# Altium PCB Arduino mega shield.PcbDoc
Units mil, origin at the board's own origin, x right, y up, seen from the top; angles counter-clockwise.
Board outline 5118.11 x 3346.46 mil, 2 copper layers (Top Layer, Bottom Layer); 32 components, 122 nets, 161 pads, 0 vias.
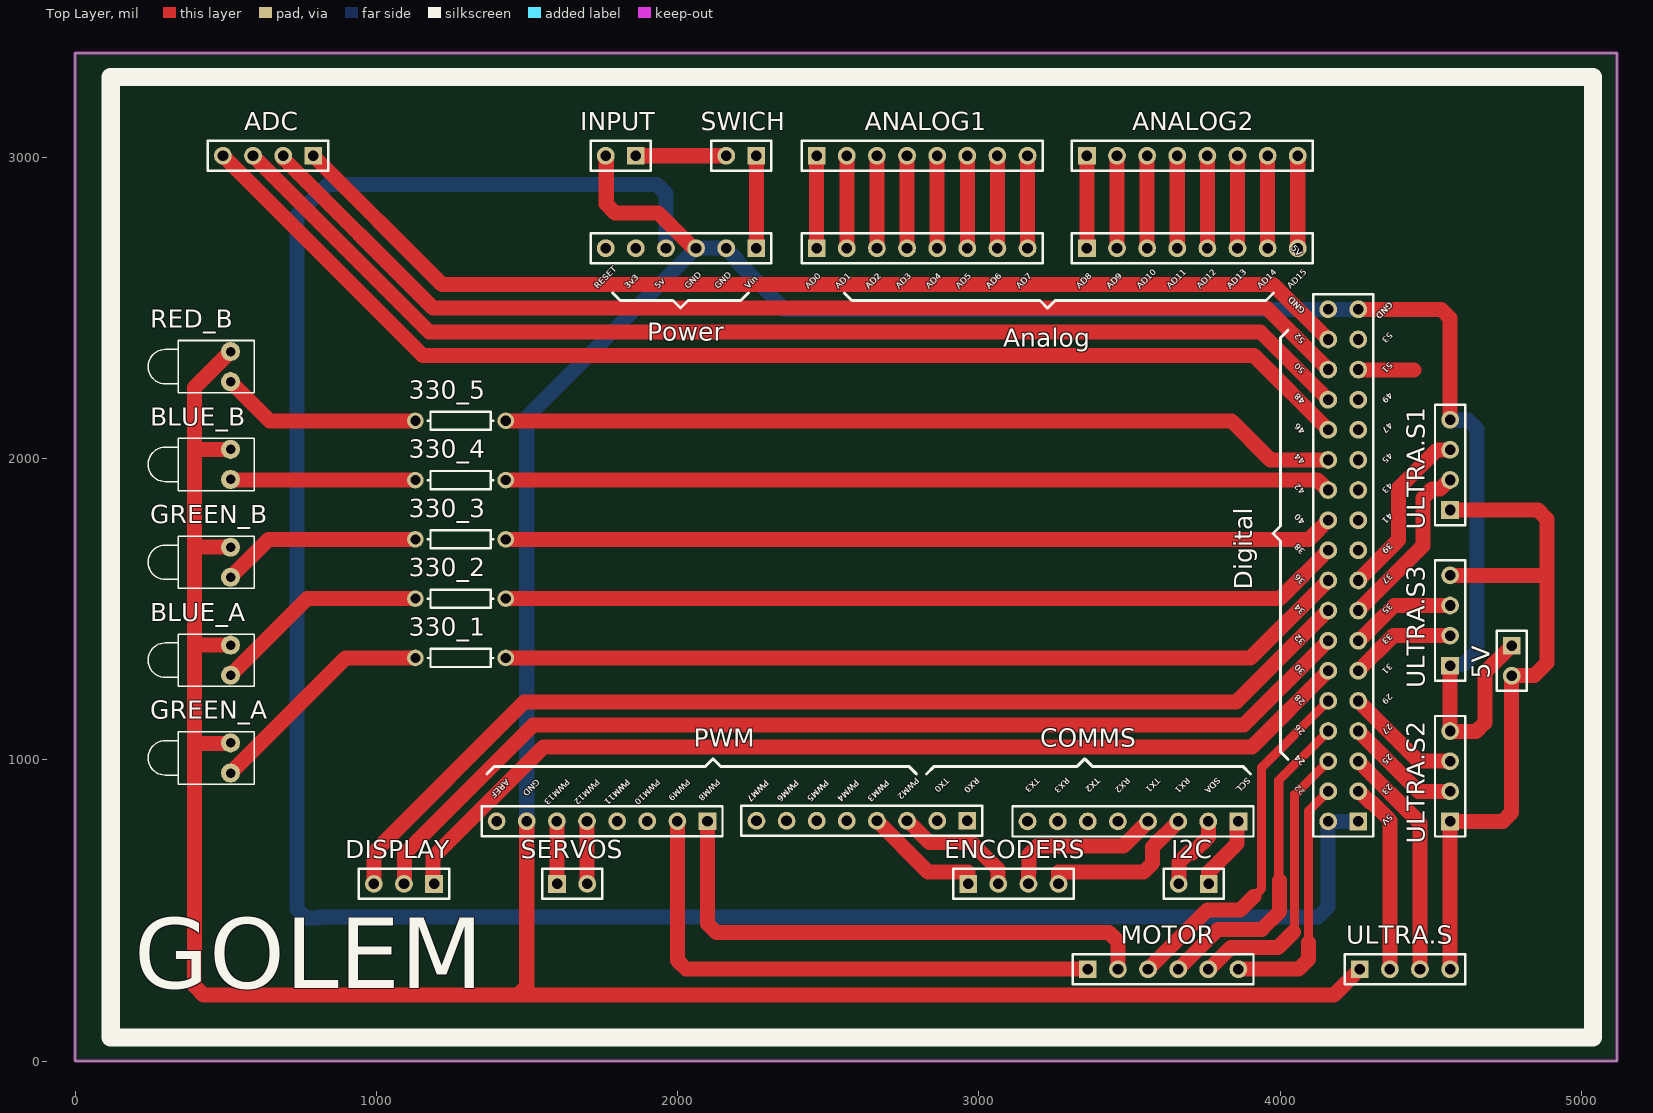
[diagram p0: Top Layer view]
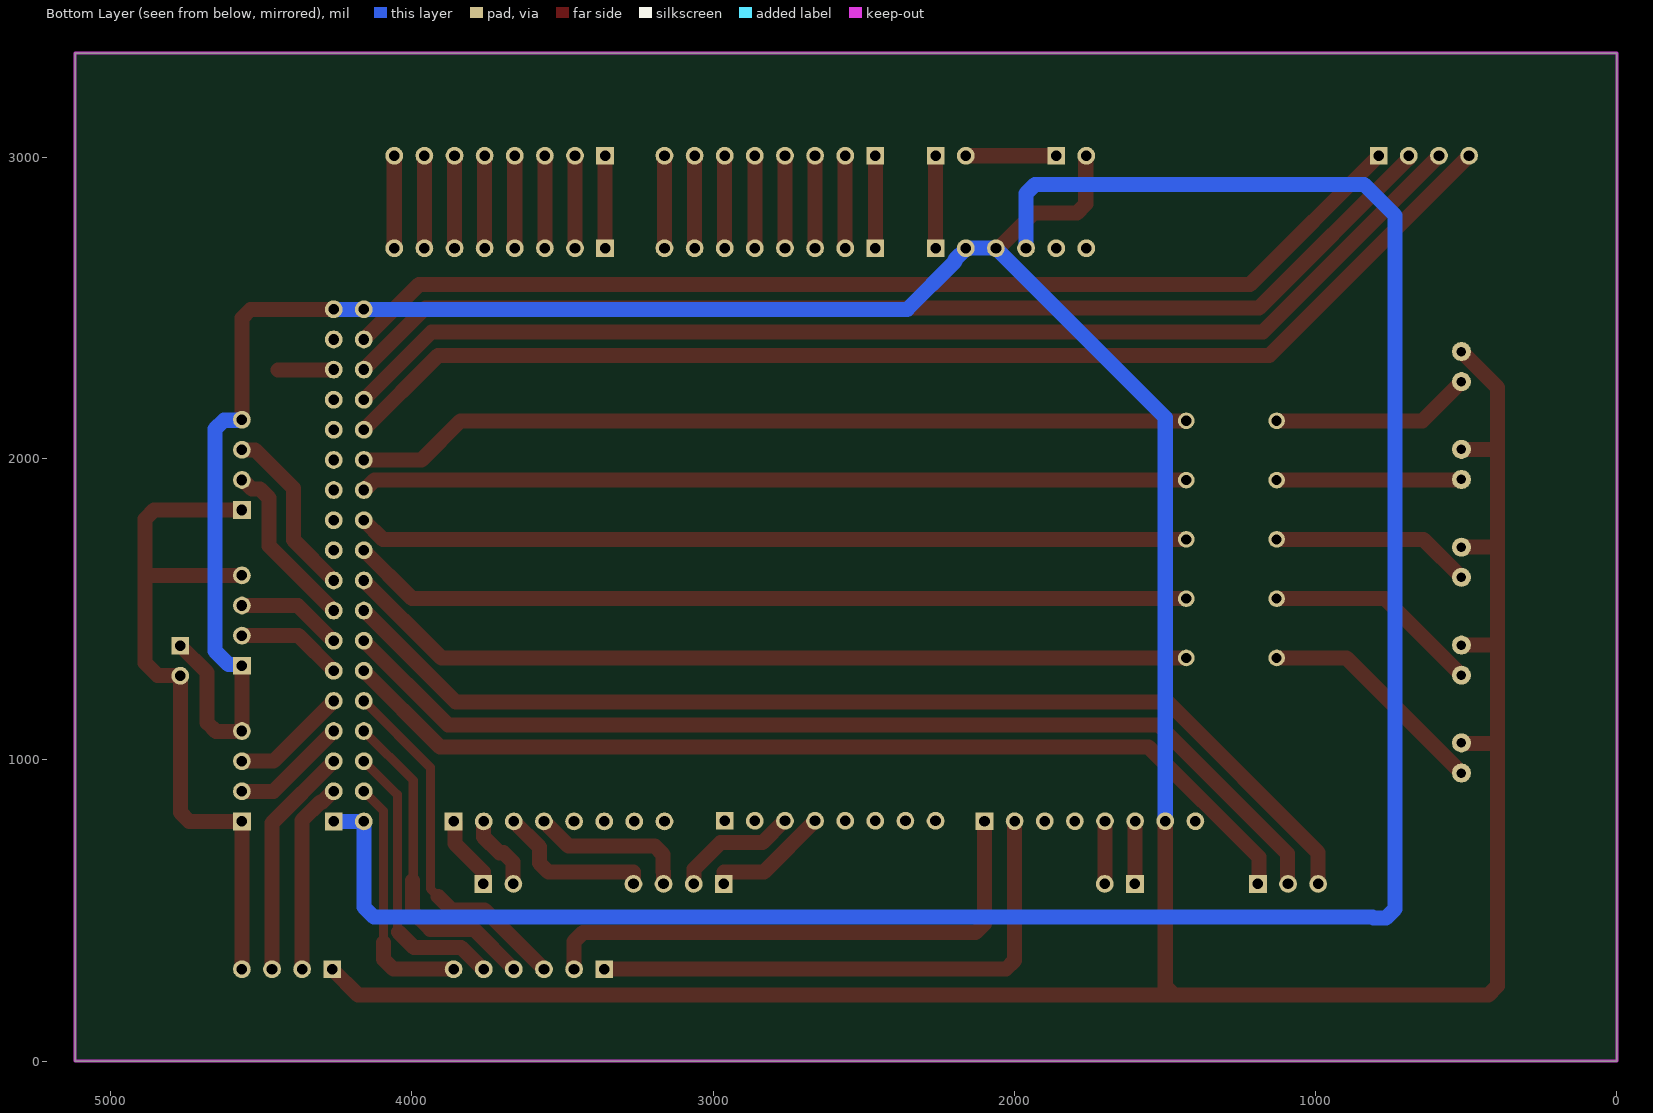
[diagram p1: Bottom Layer view, seen from below]

## Layer stack, top to bottom
Top Solder: solder mask 0.4, Solder Resist, Dk 3.5
Top Layer: signal copper 1.4
Dielectric 1: dielectric 12.6, FR-4, Dk 4.8
Bottom Layer: signal copper 1.4
Bottom Solder: solder mask 0.4, Solder Resist, Dk 3.5

## Board outline
0,0 0,3346.46 5118.11,3346.46 5118.11,0

## Design rules (kind name [scope] priority, off if disabled: settings)
Clearance [All] p1: gap=10 ignorepadtopadclearanceinfootprint=FALSE
ComponentClearance [All] p1: gap=10 collisioncheckmode=3 verticalgap=10 showdistances=FALSE donotcheckwithout3dbody=TRUE
PolygonConnect [All] p1: connectstyle=Relief reliefconductorwidth=10 reliefentries=4 polygonreliefangle="90 Angle" airgapwidth=10
RoomDefinition Designator [InComponentClass('Designator')] p1: confinementstyle=ConfineIn formatcopy=TRUE lockcomponents=FALSE outline 6441.7,2139.06 7818.7,2139.06 7818.7,2033.06 6441.7,2033.06
RoutingVias [All] p1: holewidth=28 width=50 viastyle="Through Hole" minholewidth=28 minwidth=50 maxholewidth=28 maxwidth=50
SolderMaskExpansion [All] p1: expansion=4 istentingtop=FALSE
Width [All] p1: maxlimit=80 minlimit=30 preferedwidth=60
29 further rules are at their usual default settings.

## Components (designator, comment, footprint, x,y, rotation, side; value= is the part's Value field where it differs from the comment)
5V "INPUT 5V" HDR1X2 4769.13,1379.33 r270 top
330_1 "Res1" AXIAL-0.3 1279.53,1338.58 r0 top
330_2 "Res1" AXIAL-0.3 1279.53,1535.43 r0 top
330_3 "Res1" AXIAL-0.3 1279.53,1732.28 r0 top
330_4 "Res1" AXIAL-0.3 1279.53,1929.13 r0 top
330_5 "Res1" AXIAL-0.3 1279.53,2125.98 r0 top
AD_H "Header 8" HDR1X8 3358.7,2698.96 r0 top
AD_L1 "Header 8" HDR1X8 2461.7,2698.96 r0 top
ADC "ADC Device" HDR1X4 790.55,3005.91 r180 top
ANALOG1 "ANALOG PINS 2" HDR1X8 2461.7,3005.91 r0 top
ANALOG2 "ANALOG PINS 2" HDR1X8 3358.7,3005.91 r0 top
BLUE_A "LED1" LED-1 515.75,1331.49 r180 top
BLUE_B "LED1" LED-1 515.75,1981.1 r180 top
COMMS "Header 8" HDR1X8 3861.76,795.99 r180 top
DISPLAY "DISPLAY PINS" HDR1X3 1191.65,588.69 r180 top
ENCODERS "ENCODER MOTOR PINS" HDR1X4 2964.7,588.69 r0 top
GREEN_A "LED1" LED-1 515.75,1006.69 r180 top
GREEN_B "LED1" LED-1 515.75,1656.29 r180 top
I2C "I2C PINS" HDR1X2 3763.34,588.69 r180 top
INPUT "INPUT  PINS" HDR1X2 1861.34,3005.91 r180 top
MOTOR "MOTOR PINS" HDR1X6 3361.76,305.35 r0 top
POWER1 "Header 6" HDR1X6 2261.34,2698.96 r180 top
PWM_H "Header 8" HDR1X8 2099.22,796.83 r180 top
PWM_L "Header 8" HDR1X8 2961.76,797.89 r180 top
RED_B "LED1" LED-1 515.75,2305.9 r180 top
SERVOS "SERVO MOTOR PINS" HDR1X2 1600.08,588.69 r0 top
SWICH "SWICH  PINS" HDR1X2 2261.34,3005.91 r180 top
ULTRA.S "ULTRASONIC SENSOR" HDR1X4 4264.55,305.35 r0 top
ULTRA.S1 "ULTRASONIC SENSOR" HDR1X4 4564.55,1829.56 r90 top
ULTRA.S2 "ULTRASONIC SENSOR" HDR1X4 4564.55,795.99 r90 top
ULTRA.S3 "ULTRASONIC SENSOR" HDR1X4 4564.55,1312.78 r90 top
? "Header 18X2" HDR2X18 4259.7,795.99 r90 top

## Footprints (in the part's own frame and the unit in brackets; to place one, negate y for a bottom-side part, rotate by r counter-clockwise, add the part's x,y. Pads: shape width x height; smd on the part's side, far side on the other; paste and mask are expansions set on the pad)
AXIAL-0.3 [mm] "Axial Device, Thru-Hole; 2 Leads; 0.3 in Pin Spacing"
  round 1.4 hole 0.85: 1(-3.81,0) 2(3.81,0)
  silkscreen extent -2.77,-0.76 2.77,0.76
HDR1X2 [mm] "Connector; Header; 2 Position"
  rect 1.5x1.5 hole 0.9: 1(0,0)
  round 1.5 hole 0.9: 2(2.54,0)
  silkscreen extent -1.27,-1.27 3.81,1.27
HDR1X3 [mm] "Connector; Header; 3 Position"
  rect 1.5x1.5 hole 0.9: 1(0,0)
  round 1.5 hole 0.9: 2(2.54,0) 3(5.08,0)
  silkscreen extent -1.27,-1.27 6.35,1.27
HDR1X4 [mm] "Connector; Header; 4 Position"
  rect 1.5x1.5 hole 0.9: 1(0,0)
  round 1.5 hole 0.9: 2(2.54,0) 3(5.08,0) 4(7.62,0)
  silkscreen extent -1.27,-1.27 8.89,1.27
HDR1X6 [mm] "Connector; Header; 6 Position"
  rect 1.5x1.5 hole 0.9: 1(0,0)
  round 1.5 hole 0.9: 2(2.54,0) 3(5.08,0) 4(7.62,0) 5(10.16,0) 6(12.7,0)
  silkscreen extent -1.27,-1.27 13.97,1.27
HDR1X8 [mm] "Connector; Header; 8 Position"
  rect 1.5x1.5 hole 0.9: 1(0,0)
  round 1.5 hole 0.9: 2(2.54,0) 3(5.08,0) 4(7.62,0) 5(10.16,0) 6(12.7,0) 7(15.24,0) 8(17.78,0)
  silkscreen extent -1.27,-1.27 19.05,1.27
HDR2X18 [mm] "Connector; Header; 18x2 Position"
  rect 1.5x1.5 hole 0.9: 1(0,0)
  round 1.5 hole 0.9: 2(0,2.54) 3(2.54,0) 4(2.54,2.54) 5(5.08,0) 6(5.08,2.54) 7(7.62,0) 8(7.62,2.54) 9(10.16,0) 10(10.16,2.54) 11(12.7,0) 12(12.7,2.54) 13(15.24,0) 14(15.24,2.54) 15(17.78,0) 16(17.78,2.54) 17(20.32,0) 18(20.32,2.54) 19(22.86,0) 20(22.86,2.54) 21(25.4,0) 22(25.4,2.54) 23(27.94,0) 24(27.94,2.54) 25(30.48,0) 26(30.48,2.54) 27(33.02,0) 28(33.02,2.54) 29(35.56,0) 30(35.56,2.54) 31(38.1,0) 32(38.1,2.54) 33(40.64,0) 34(40.64,2.54) 35(43.18,0) 36(43.18,2.54)
  silkscreen extent -1.27,-1.27 44.45,3.81
LED-1 [mm] "LED; 2 Leads"
  round 1.6 hole 0.8: 1(0,1.27) 2(0,-1.27)
  silkscreen extent -2,-2.2 6.95,2.2

## Part data
5V I2C INPUT SERVOS SWICH: library part "Header 2", "Header, 2-Pin", LatestRevisionDate=17-Jul-2002, LatestRevisionNote="Re-released for DXP Platform.", Publisher="Altium Limited"
330_1 330_2 330_3 330_4 330_5: "Resistor", LatestRevisionDate=17-Jul-2002, LatestRevisionNote="Re-released for DXP Platform.", PackageDescription="Axial Device, Thru-Hole; 2 Leads; 0.3 in Pin Spacing", PackageReference=AXIAL-0.3, Published=8-Jun-2000, Publisher="Altium Limited"
AD_H AD_L1 COMMS PWM_H PWM_L: "Header, 8-Pin", LatestRevisionDate=17-Jul-2002, LatestRevisionNote="Re-released for DXP Platform.", Publisher="Altium Limited"
ADC ENCODERS ULTRA.S ULTRA.S1 ULTRA.S2 ULTRA.S3: library part "Header 4", "Header, 4-Pin", LatestRevisionDate=17-Jul-2002, LatestRevisionNote="Re-released for DXP Platform.", Publisher="Altium Limited"
ANALOG1 ANALOG2: library part "Header 8", "Header, 8-Pin", LatestRevisionDate=17-Jul-2002, LatestRevisionNote="Re-released for DXP Platform.", Publisher="Altium Limited"
BLUE_A BLUE_B GREEN_A GREEN_B RED_B: "Typical RED GaAs LED", LatestRevisionDate=08-Jul-2005, LatestRevisionNote="Mech Layer 1 removed.", PackageDescription="LED; 2 Leads", PackageReference=LED-1, Published=8-Jun-2000, Publisher="Altium Limited"
DISPLAY: library part "Header 3", "Header, 3-Pin", LatestRevisionDate=17-Jul-2002, LatestRevisionNote="Re-released for DXP Platform.", Publisher="Altium Limited"
MOTOR: library part "Header 6", "Header, 6-Pin", LatestRevisionDate=17-Jul-2002, LatestRevisionNote="Re-released for DXP Platform.", Publisher="Altium Limited"
POWER1: "Header, 6-Pin", LatestRevisionDate=17-Jul-2002, LatestRevisionNote="Re-released for DXP Platform.", Publisher="Altium Limited"
?: "Header, 18-Pin, Dual row", LatestRevisionDate=17-Jul-2002, LatestRevisionNote="Re-released for DXP Platform.", Publisher="Altium Limited"

## Nets (pads, with @x,y where several pads share a name; then routed paths per layer and width w, separated by ;. In a path a pad name is that pad's centre, name@x,y a point inside that pad or via, vN(x,y) a via of type N, cw(c..) or ccw(c..) an arc to the next point about the centre after c; other vN are vias at no path point)
3V3: POWER1.5
5V: ?.1 ?.2 POWER1.4 | length 7597.9
  Bottom Layer w50: POWER1.4 1961.34,2880.77 1932.05,2910.06 838.7,2910.06 736.7,2808.06 736.7,505.06 765.99,475.77 807.41,475.77 810.7,479.06 4126.7,479.06 4159.7,512.06 ?.2 ?.1
+5: 5V.2 ULTRA.S1.1 ULTRA.S2.1 ULTRA.S3.4 ULTRA.S.4 | length 2430
  Top Layer w50: ULTRA.S.4 ULTRA.S2.1 4739.41,795.99 4768.7,825.28 4768.7,1278.91 5V.2 4770.86,1281.06 4844.71,1281.06 4885.7,1322.06 4885.7,1608.06 ; ULTRA.S3.4 4880.98,1612.78 4885.7,1608.06 ; ULTRA.S1.1 4856.41,1829.56 4885.7,1800.27 4885.7,1608.06
AD0: AD_L1.1 ANALOG1.1 | length 306.9
  Top Layer w50: AD_L1.1 ANALOG1.1
AD1: AD_L1.2 ANALOG1.2 | length 306.9
  Top Layer w50: AD_L1.2 ANALOG1.2
AD2: AD_L1.3 ANALOG1.3 | length 306.9
  Top Layer w50: AD_L1.3 ANALOG1.3
AD3: AD_L1.4 ANALOG1.4 | length 306.9
  Top Layer w50: AD_L1.4 ANALOG1.4
AD4: AD_L1.5 ANALOG1.5 | length 306.9
  Top Layer w50: AD_L1.5 ANALOG1.5
AD5: AD_L1.6 ANALOG1.6 | length 306.9
  Top Layer w50: AD_L1.6 ANALOG1.6
AD6: AD_L1.7 ANALOG1.7 | length 306.9
  Top Layer w50: AD_L1.7 ANALOG1.7
AD7: AD_L1.8 ANALOG1.8 | length 306.9
  Top Layer w50: AD_L1.8 ANALOG1.8
AD8: AD_H.1 ANALOG2.1 | length 306.9
  Top Layer w50: AD_H.1 ANALOG2.1
AD9: AD_H.2 ANALOG2.2 | length 306.9
  Top Layer w50: AD_H.2 ANALOG2.2
AD10: AD_H.3 ANALOG2.3 | length 306.9
  Top Layer w50: AD_H.3 ANALOG2.3
AD11: AD_H.4 ANALOG2.4 | length 306.9
  Top Layer w50: AD_H.4 ANALOG2.4
AD12: AD_H.5 ANALOG2.5 | length 306.9
  Top Layer w50: AD_H.5 ANALOG2.5
AD13: AD_H.6 ANALOG2.6 | length 306.9
  Top Layer w50: AD_H.6 ANALOG2.6
AD14: AD_H.7 ANALOG2.7 | length 306.9
  Top Layer w50: AD_H.7 ANALOG2.7
AD15: AD_H.8 ANALOG2.8 | length 306.9
  Top Layer w50: AD_H.8 ANALOG2.8
AREF: PWM_H.8
GND: 5V.1 ?.35 ?.36 BLUE_A.2 BLUE_B.2 GREEN_A.2 GREEN_B.2 INPUT.2 POWER1.2 POWER1.3 PWM_H.7 RED_B.2 ULTRA.S1.4 ULTRA.S2.4 ULTRA.S3.1 ULTRA.S.1 | length 14330.4
  Top Layer w50: GREEN_A.2 514.12,1055.06 396.87,1055.06 ; BLUE_A.2 515.19,1382.06 395.87,1382.06 ; GREEN_B.2 400.63,1706.29 395.87,1711.06 ; BLUE_B.2 398.83,2031.1 395.87,2034.06 ; RED_B.2 395.87,2236.01 395.87,2034.06 ; PWM_H.7 1499.22,249.34 1469.93,220.06 ; INPUT.2 1763.07,3004.17 1763.07,2845.34 1792.36,2816.06 1935.5,2816.06 2050.87,2700.69 2059.61,2700.69 POWER1.3 ; ?.35 4535.26,2495.99 4564.55,2466.7 ULTRA.S1.4 ; ULTRA.S.1 4179.25,220.06 1469.93,220.06 ; ULTRA.S3.1 ULTRA.S2.4 4566.28,1094.26 4650.41,1094.26 4679.7,1123.55 4679.7,1289.91 5V.1 4769.13,1383.28 5V.1@4769.7,1383.86 ; 395.87,1382.06 395.87,1173.06 396.87,1172.06 396.87,1055.06 ; 395.87,1382.06 395.87,1711.06 ; 395.87,1711.06 395.87,2034.06 ; 396.87,1055.06 396.87,249.34 426.16,220.06 1469.93,220.06
  Bottom Layer w50: PWM_H.7 1499.22,2136.83 POWER1.3 POWER1.2 2161.34,2696.51 2196.81,2661.04 2196.81,2654.93 2355.76,2495.99 ?.36 ?.35@4259.64,2495.99 ; ULTRA.S3.1 4569.08,1317.3 4608.95,1317.3 4653.7,1362.06 4653.7,2098.54 4624.41,2127.83 4566.28,2127.83 ULTRA.S1.4
IO22: ?.4 MOTOR.6 | length 832.6
  Top Layer w30: 4094.7,393.49 4094.7,830.99 4157.25,893.54 ?.4@4159.7,893.54
  Top Layer w50: MOTOR.6 4061.71,305.35 4094.7,338.34 4094.7,393.49 ; ?.4@4159.7,893.54 ?.4
IO23: ?.3 ULTRA.S.2 | length 640.4
  Top Layer w50: ?.3@4260.67,895.02 ?.3 4262.15,895.99 4297.62,860.52 4303.73,860.52 4364.55,799.69 ULTRA.S.2
IO24: ?.6 MOTOR.5 | length 948.7
  Top Layer w30: 4044.7,429.2 4048.7,433.2 4048.7,884.99 ?.6
  Top Layer w50: MOTOR.5 3764.21,305.35 3836.66,377.8 3993.3,377.8 4044.7,429.2
IO25: ?.5 ULTRA.S.3 | length 775.5
  Top Layer w50: ?.5 4464.55,791.14 ULTRA.S.3
IO26: ?.8 MOTOR.4 | length 1084.3
  Top Layer w30: 3998.7,599.2 3995.7,602.2 3995.7,931.99 ?.8
  Top Layer w50: MOTOR.4 3794.21,437.8 3939.15,437.8 3998.7,497.34 3998.7,599.2
IO27: ?.7 ULTRA.S2.2 | length 387.7
  Top Layer w50: ?.7 4459.7,895.99 ULTRA.S2.2
IO28: ?.10 MOTOR.3 | length 1202.3
  Top Layer w30: 3912.7,547.06 3938.7,573.06 3938.7,974.99 ?.10
  Top Layer w50: MOTOR.3 3758.46,502.06 3867.7,502.06 3912.7,547.06
IO29: ?.9 ULTRA.S2.3 | length 387.7
  Top Layer w50: ?.9 4459.7,995.99 ULTRA.S2.3
IO30: ?.12 DISPLAY.1 | length 3317.3
  Top Layer w50: DISPLAY.1 1188.7,591.64 1188.7,677.57 1554.44,1043.31 3907.02,1043.31 ?.12
IO31: ?.11 ULTRA.S3.2 | length 353.2
  Top Layer w50: ?.11 4376.48,1412.78 ULTRA.S3.2
IO32: ?.14 DISPLAY.2 | length 3460
  Top Layer w50: DISPLAY.2 1093.39,590.42 1093.39,688.74 1520.7,1116.06 3879.76,1116.06 ?.14
IO33: ?.13 ULTRA.S3.3 | length 353.2
  Top Layer w50: ?.13 4262.15,1395.99 4378.93,1512.78 ULTRA.S3.3
IO34: ?.16 DISPLAY.3 | length 3605
  Top Layer w50: DISPLAY.3 991.86,588.89 991.86,693.21 1490.7,1192.06 3854.7,1192.06 4158.64,1495.99 ?.16
IO35: ?.15 ULTRA.S1.2 | length 577.4
  Top Layer w50: ?.15 4474.7,1710.99 4474.7,1869.77 4503.99,1899.06 4531.6,1899.06 4562.1,1929.56 ULTRA.S1.2
IO36: 330_1.2 ?.18 | length 2836.8
  Top Layer w50: 330_1.2 3902.29,1338.58 ?.18
IO37: ?.17 ULTRA.S1.3 | length 585.2
  Top Layer w50: ?.17 4393.57,1729.86 4393.57,1901.92 4521.2,2029.56 ULTRA.S1.3
IO38: 330_2.2 ?.20 | length 2796.7
  Top Layer w50: 330_2.2 1430.15,1536.06 3999.76,1536.06 ?.20
IO39: ?.19
IO40: 330_3.2 ?.22 | length 2756.6
  Top Layer w50: 330_3.2 4095.99,1732.28 ?.22
IO41: ?.21
IO42: 330_4.2 ?.24 | length 2743.9
  Top Layer w50: 330_4.2 4124.11,1929.13 4157.25,1895.99 ?.24
IO43: ?.23
IO44: 330_5.2 ?.26 | length 2784
  Top Layer w50: 330_5.2 3838.58,2125.98 3968.57,1995.99 ?.26
IO45: ?.25
IO46: ?.28 ADC.4 | length 4046
  Top Layer w50: ADC.4 1153.94,2342.52 3913.17,2342.52 ?.28
IO47: ?.27
IO48: ?.30 ADC.3 | length 3904.6
  Top Layer w50: ADC.3 1175.2,2421.26 3934.43,2421.26 ?.30
IO49: ?.29
IO50: ?.32 ADC.2 | length 3768.2
  Top Layer w50: ADC.2 692.28,3004.17 692.28,2995.62 1187.9,2500 3955.69,2500 ?.32
IO51: ?.31 | length 185.4
  Top Layer w50: ?.31 4260.64,2295.06 4444.7,2295.06
IO52: ?.34 ADC.1 | length 3621.8
  Top Layer w50: ADC.1 1217.72,2578.74 3976.95,2578.74 ?.34
IO53: ?.33
Net330_1_1: 330_1.1 GREEN_A.1 | length 772
  Top Layer w50: GREEN_A.1 897.65,1338.58 330_1.1
Net330_2_1: 330_2.1 BLUE_A.1 | length 719
  Top Layer w50: BLUE_A.1 769.7,1535.43 330_2.1
Net330_3_1: 330_3.1 GREEN_B.1 | length 666
  Top Layer w50: GREEN_B.1 641.75,1732.28 330_3.1
Net330_4_1: 330_4.1 BLUE_B.1 | length 614.6
  Top Layer w50: BLUE_B.1 516.74,1930.11 1128.55,1930.11 330_4.1
Net330_5_1: 330_5.1 RED_B.1 | length 667.6
  Top Layer w50: RED_B.1 645.67,2125.98 330_5.1
"NetADC l_1": 
"NetADC l_2": 
"NetADC l_3": 
"NetADC l_4": 
"NetADC l_5": 
"NetADC l_6": 
"NetADC l_7": 
"NetADC l_8": 
"NetADC l_9": 
"NetADC l_10": 
"NetADC l_11": 
"NetADC l_12": 
"NetADC l_13": 
"NetADC l_14": 
"NetADC l_15": 
"NetADC l_16": 
"NetADC r_1": 
"NetADC r_2": 
"NetADC r_3": 
"NetADC r_4": 
"NetADC r_5": 
"NetI2c l_3": 
"NetI2c l_4": 
"NetI2c l_9": 
"NetI2c l_10": 
"NetI2c l_11": 
"NetI2c l_12": 
"NetI2c r_1": 
"NetI2c r_2": 
"NetI2c r_3": 
"NetI2c r_4": 
"NetI2c r_5": 
"NetI2c r_6": 
"NetI2c r_7": 
"NetI2c r_8": 
"NetI2c r_9": 
"NetI2c r_10": 
"NetI2c r_11": 
"NetI2c r_12": 
NetINPUT_1: INPUT.1 SWICH.2 | length 300
  Top Layer w50: INPUT.1 SWICH.2
NetPOWER1_1: POWER1.1 SWICH.1 | length 306.9
  Top Layer w50: POWER1.1 SWICH.1
PWM2: ENCODERS.2 PWM_L.3 | length 417.7
  Top Layer w50: PWM_L.3 2764.21,797.89 2836.66,725.45 2975.86,725.45 3062.97,638.34 3062.97,590.42 ENCODERS.2
PWM3: ENCODERS.1 PWM_L.4 | length 412.7
  Top Layer w50: PWM_L.4 2831.6,628.06 2964.7,628.06 ENCODERS.1
PWM4: PWM_L.5 | length 1.3
  Top Layer w50: PWM_L.5 PWM_L.5@2562.7,796.96
PWM5: PWM_L.6
PWM6: PWM_L.7 | length 1.5
  Top Layer w50: PWM_L.7@2360.7,796.83 PWM_L.7
PWM7: PWM_L.8 | length 2.5
  Top Layer w50: PWM_L.8@2261.76,795.44 PWM_L.8
PWM8: MOTOR.2 PWM_H.1 | length 1819.7
  Top Layer w50: PWM_H.1 2099.22,456.34 2128.51,427.06 3432.47,427.06 3461.76,397.77 MOTOR.2
PWM9: MOTOR.1 PWM_H.2 | length 1836.9
  Top Layer w50: PWM_H.2 1999.22,334.64 2028.51,305.35 MOTOR.1
PWM10: PWM_H.3
PWM11: PWM_H.4
PWM12: PWM_H.5 SERVOS.2 | length 208.5
  Top Layer w50: PWM_H.5 1699.65,796.4 1699.65,589.12 SERVOS.2
PWM13: PWM_H.6 SERVOS.1 | length 211
  Top Layer w50: PWM_H.6@1597.48,795.1 PWM_H.6 1600.08,795.97 SERVOS.1
RESET: POWER1.6
RX0: PWM_L.1
RX1: COMMS.3 ENCODERS.4 | length 537.4
  Top Layer w50: ENCODERS.4 3264.7,628.06 3547.41,628.06 3576.7,657.34 3576.7,710.93 COMMS.3
RX2: COMMS.5
RX3: COMMS.7
SCL: COMMS.1 I2C.1 | length 248.1
  Top Layer w50: I2C.1 3763.34,628.06 3857.24,721.95 3857.24,791.46 COMMS.1
SDA: COMMS.2 I2C.2 | length 256.2
  Top Layer w50: I2C.2 3665.07,590.42 3665.07,661.14 3695.99,692.06 3709.49,692.06 3762.05,744.62 3762.05,795.7 COMMS.2
TX0: PWM_L.2
TX1: COMMS.4 ENCODERS.3 | length 539.2
  Top Layer w50: ENCODERS.3 3164.7,628.06 3166.43,629.79 3166.43,686.5 3193.99,714.06 3479.83,714.06 COMMS.4
TX2: COMMS.6
TX3: COMMS.8

## Keep-outs
Keep-Out Layer:
  the board outline again, w10

## Silkscreen, mask and mechanical layers (free items; w line width, h text height)
Top Overlay:
  lines w10: 1367.35,953.94 1392.35,978.94 2092.35,978.94 2117.35,1003.94 2142.35,978.94 2767.35,978.94 2792.35,953.94 ; 1784.7,2550.06 1809.7,2525.06 1984.7,2525.06 2009.7,2500.06 2034.7,2525.06 2209.7,2525.06 2234.7,2550.06 ; 2553.35,2550 2578.35,2525 3203.35,2525 3228.35,2500 3253.35,2525 3953.35,2525 3978.35,2550 ; 2826.61,953.71 2851.61,978.71 3326.61,978.71 3351.61,1003.71 3376.61,978.71 3876.61,978.71 3901.61,953.71 ; 4026.38,1001.97 4001.38,1026.97 4001.38,1726.97 3976.38,1751.97 4001.38,1776.97 4001.38,2401.97 4026.38,2426.97
  lines w60: 118.11,3267.72 118.11,78.74 5039.37,78.74 5039.37,3267.77 118.11,3267.77
  text "5V" at 4035.28,2697.89 h20 r315
  text "5V" at 4035.7,2697.06 h20 r315
  text "RESET" at 1735.28,2562.89 h20 r45
  text "3v3" at 1835.28,2562.89 h20 r45
  text "5v" at 1935.28,2562.89 h20 r45
  text "GND" at 2035.28,2562.89 h20 r45
  text "GND" at 2135.28,2562.89 h20 r45
  text "Vin" at 2235.28,2562.89 h20 r45
  text "AD0" at 2435.28,2562.89 h20 r45
  text "AD1" at 2535.28,2562.89 h20 r45
  text "AD2" at 2635.28,2562.89 h20 r45
  text "AD3" at 2735.28,2562.89 h20 r45
  text "AD4" at 2835.28,2562.89 h20 r45
  text "AD5" at 2935.28,2562.89 h20 r45
  text "AD6" at 3035.28,2562.89 h20 r45
  text "AD7" at 3135.28,2562.89 h20 r45
  text "AD8" at 3335.28,2562.89 h20 r45
  text "AD9" at 3435.28,2562.89 h20 r45
  text "AD10" at 3535.28,2562.89 h20 r45
  text "AD11" at 3635.28,2562.89 h20 r45
  text "AD12" at 3735.28,2562.89 h20 r45
  text "AD13" at 3835.28,2562.89 h20 r45
  text "AD14" at 3935.28,2562.89 h20 r45
  text "AD15" at 4035.28,2562.89 h20 r45
  text "RESET" at 1735.7,2562.06 h20 r45
  text "3v3" at 1835.7,2562.06 h20 r45
  text "5v" at 1935.7,2562.06 h20 r45
  text "GND" at 2035.7,2562.06 h20 r45
  text "GND" at 2135.7,2562.06 h20 r45
  text "Vin" at 2235.7,2562.06 h20 r45
  text "AD0" at 2435.7,2562.06 h20 r45
  text "AD1" at 2535.7,2562.06 h20 r45
  text "AD2" at 2635.7,2562.06 h20 r45
  text "AD3" at 2735.7,2562.06 h20 r45
  text "AD4" at 2835.7,2562.06 h20 r45
  text "AD5" at 2935.7,2562.06 h20 r45
  text "AD6" at 3035.7,2562.06 h20 r45
  text "AD7" at 3135.7,2562.06 h20 r45
  text "AD8" at 3335.7,2562.06 h20 r45
  text "AD9" at 3435.7,2562.06 h20 r45
  text "AD10" at 3535.7,2562.06 h20 r45
  text "AD11" at 3635.7,2562.06 h20 r45
  text "AD12" at 3735.7,2562.06 h20 r45
  text "AD13" at 3835.7,2562.06 h20 r45
  text "AD14" at 3935.7,2562.06 h20 r45
  text "AD15" at 4035.7,2562.06 h20 r45
  text "GND" at 4361.7,2522.06 h20 r225
  text "GND" at 4362.12,2521.22 h20 r225
  text "GND" at 4084.7,2494.06 h20 r135
  text "GND" at 4085.12,2493.22 h20 r135
  text "53" at 4361.7,2422.06 h20 r225
  text "53" at 4362.12,2421.22 h20 r225
  text "52" at 4084.7,2394.06 h20 r135
  text "52" at 4085.12,2393.22 h20 r135
  text "Power" at 1899.76,2391.89 h60
  text "Analog" at 3080.87,2372.51 h60
  text "51" at 4361.7,2322.06 h20 r225
  text "51" at 4362.12,2321.22 h20 r225
  text "50" at 4084.7,2294.06 h20 r135
  text "50" at 4085.12,2293.22 h20 r135
  text "49" at 4361.7,2222.06 h20 r225
  text "49" at 4362.12,2221.22 h20 r225
  text "48" at 4084.7,2194.06 h20 r135
  text "48" at 4085.12,2193.22 h20 r135
  text "47" at 4361.7,2122.06 h20 r225
  text "47" at 4362.12,2121.22 h20 r225
  text "46" at 4084.7,2094.06 h20 r135
  text "46" at 4085.12,2093.22 h20 r135
  text "45" at 4361.7,2022.06 h20 r225
  text "45" at 4362.12,2021.22 h20 r225
  text "44" at 4084.7,1994.06 h20 r135
  text "44" at 4085.12,1993.22 h20 r135
  text "43" at 4361.7,1922.06 h20 r225
  text "43" at 4362.12,1921.22 h20 r225
  text "42" at 4084.7,1894.06 h20 r135
  text "42" at 4085.12,1893.22 h20 r135
  text "41" at 4361.7,1822.06 h20 r225
  text "41" at 4362.12,1821.22 h20 r225
  text "40" at 4084.7,1794.06 h20 r135
  text "40" at 4085.12,1793.22 h20 r135
  text "39" at 4361.7,1722.06 h20 r225
  text "39" at 4362.12,1721.22 h20 r225
  text "38" at 4084.7,1694.06 h20 r135
  text "38" at 4085.12,1693.22 h20 r135
  text "37" at 4361.7,1622.06 h20 r225
  text "37" at 4362.12,1621.22 h20 r225
  text "36" at 4084.7,1594.06 h20 r135
  text "36" at 4085.12,1593.22 h20 r135
  text "Digital" at 3907.01,1565.12 h60 r90
  text "35" at 4361.7,1522.06 h20 r225
  text "35" at 4362.12,1521.22 h20 r225
  text "34" at 4084.7,1494.06 h20 r135
  text "34" at 4085.12,1493.22 h20 r135
  text "33" at 4361.7,1422.06 h20 r225
  text "33" at 4362.12,1421.22 h20 r225
  text "32" at 4084.7,1394.06 h20 r135
  text "32" at 4085.12,1393.22 h20 r135
  text "31" at 4361.7,1322.06 h20 r225
  text "31" at 4362.12,1321.22 h20 r225
  text "30" at 4084.7,1294.06 h20 r135
  text "30" at 4085.12,1293.22 h20 r135
  text "29" at 4361.7,1222.06 h20 r225
  text "29" at 4362.12,1221.22 h20 r225
  text "28" at 4084.7,1194.06 h20 r135
  text "28" at 4085.12,1193.22 h20 r135
  text "27" at 4361.7,1122.06 h20 r225
  text "27" at 4362.12,1121.22 h20 r225
  text "26" at 4084.7,1094.06 h20 r135
  text "26" at 4085.12,1093.22 h20 r135
  text "PWM" at 2053.61,1044.06 h60
  text "COMMS" at 3203.7,1044.06 h60
  text "25" at 4361.7,1022.06 h20 r225
  text "25" at 4362.12,1021.22 h20 r225
  text "24" at 4084.7,994.06 h20 r135
  text "24" at 4085.12,993.22 h20 r135
  text "PWM2" at 2790.28,942.89 h20 r225
  text "TX0" at 2890.28,942.89 h20 r225
  text "RX0" at 2990.28,942.89 h20 r225
  text "TX3" at 3190.28,942.89 h20 r225
  text "RX3" at 3290.28,942.89 h20 r225
  text "TX2" at 3390.28,942.89 h20 r225
  text "RX2" at 3490.28,942.89 h20 r225
  text "TX1" at 3590.28,942.89 h20 r225
  text "RX1" at 3690.28,942.89 h20 r225
  text "SDA" at 3790.28,942.89 h20 r225
  text "SCL" at 3890.28,942.89 h20 r225
  text "PWM2" at 2790.7,942.06 h20 r225
  text "TX0" at 2890.7,942.06 h20 r225
  text "RX0" at 2990.7,942.06 h20 r225
  text "TX3" at 3190.7,942.06 h20 r225
  text "RX3" at 3290.7,942.06 h20 r225
  text "TX2" at 3390.7,942.06 h20 r225
  text "RX2" at 3490.7,942.06 h20 r225
  text "TX1" at 3590.7,942.06 h20 r225
  text "RX1" at 3690.7,942.06 h20 r225
  text "SDA" at 3790.7,942.06 h20 r225
  text "SCL" at 3890.7,942.06 h20 r225
  text "AREF" at 1430.28,937.89 h20 r225
  text "GND" at 1530.28,937.89 h20 r225
  text "PWM13" at 1630.28,937.89 h20 r225
  text "PWM12" at 1730.28,937.89 h20 r225
  text "PWM11" at 1830.28,937.89 h20 r225
  text "PWM10" at 1930.28,937.89 h20 r225
  text "PWM9" at 2030.28,937.89 h20 r225
  text "PWM8" at 2130.28,937.89 h20 r225
  text "AREF" at 1430.7,937.06 h20 r225
  text "GND" at 1530.7,937.06 h20 r225
  text "PWM13" at 1630.7,937.06 h20 r225
  text "PWM12" at 1730.7,937.06 h20 r225
  text "PWM11" at 1830.7,937.06 h20 r225
  text "PWM10" at 1930.7,937.06 h20 r225
  text "PWM9" at 2030.7,937.06 h20 r225
  text "PWM8" at 2130.7,937.06 h20 r225
  text "PWM7" at 2290.28,935.82 h20 r225
  text "PWM6" at 2390.28,935.82 h20 r225
  text "PWM5" at 2490.28,935.82 h20 r225
  text "PWM4" at 2590.28,935.82 h20 r225
  text "PWM3" at 2690.28,935.82 h20 r225
  text "PWM7" at 2290.7,934.98 h20 r225
  text "PWM6" at 2390.7,934.98 h20 r225
  text "PWM5" at 2490.7,934.98 h20 r225
  text "PWM4" at 2590.7,934.98 h20 r225
  text "PWM3" at 2690.7,934.98 h20 r225
  text "23" at 4361.7,922.06 h20 r225
  text "23" at 4362.12,921.22 h20 r225
  text "22" at 4084.7,894.06 h20 r135
  text "5V" at 4361.7,822.06 h20 r225
  text "5V" at 4362.12,821.22 h20 r225
  text "GOLEM" at 196.85,166.37 h400
Mechanical 1:
  lines w5: 460.28,697.89 460.28,2797.89 4260.28,2797.89 4360.28,2697.89 4360.28,2297.89 4460.28,2197.89 4460.28,847.89 4360.28,747.89 4360.28,697.89 460.28,697.89 ; 460.7,697.06 460.7,2797.06 4260.7,2797.06 4360.7,2697.06 4360.7,2297.06 4460.7,2197.06 4460.7,847.06 4360.7,747.06 4360.7,697.06 460.7,697.06 ; 461.22,697.17 461.22,2797.17 4261.22,2797.17 4361.22,2697.17 4361.22,2297.17 4461.22,2197.17 4461.22,847.17 4361.22,747.17 4361.22,697.17 461.22,697.17